# Altium PCB PCB.PcbDoc
Units mm, origin at the board's own origin, x right, y up, seen from the top; angles counter-clockwise.
Board outline 36.07 x 18.54 mm, 2 copper layers (Top Layer, Bottom Layer); 30 components, 21 nets, 74 pads, 11 vias.
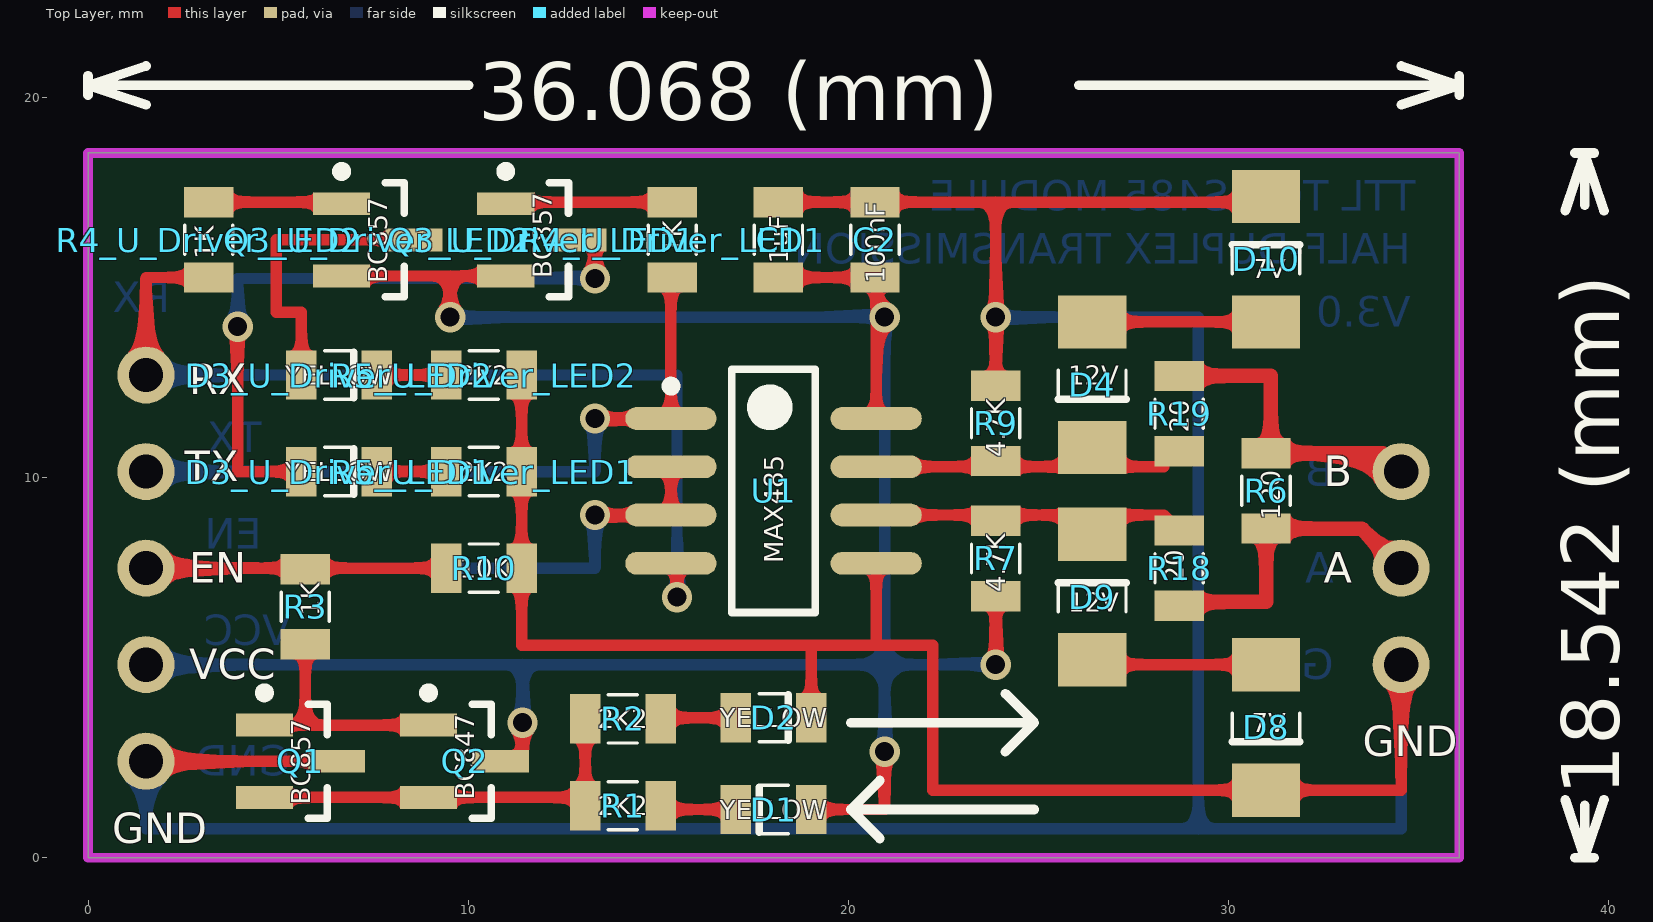
[diagram p0: Top Layer view]
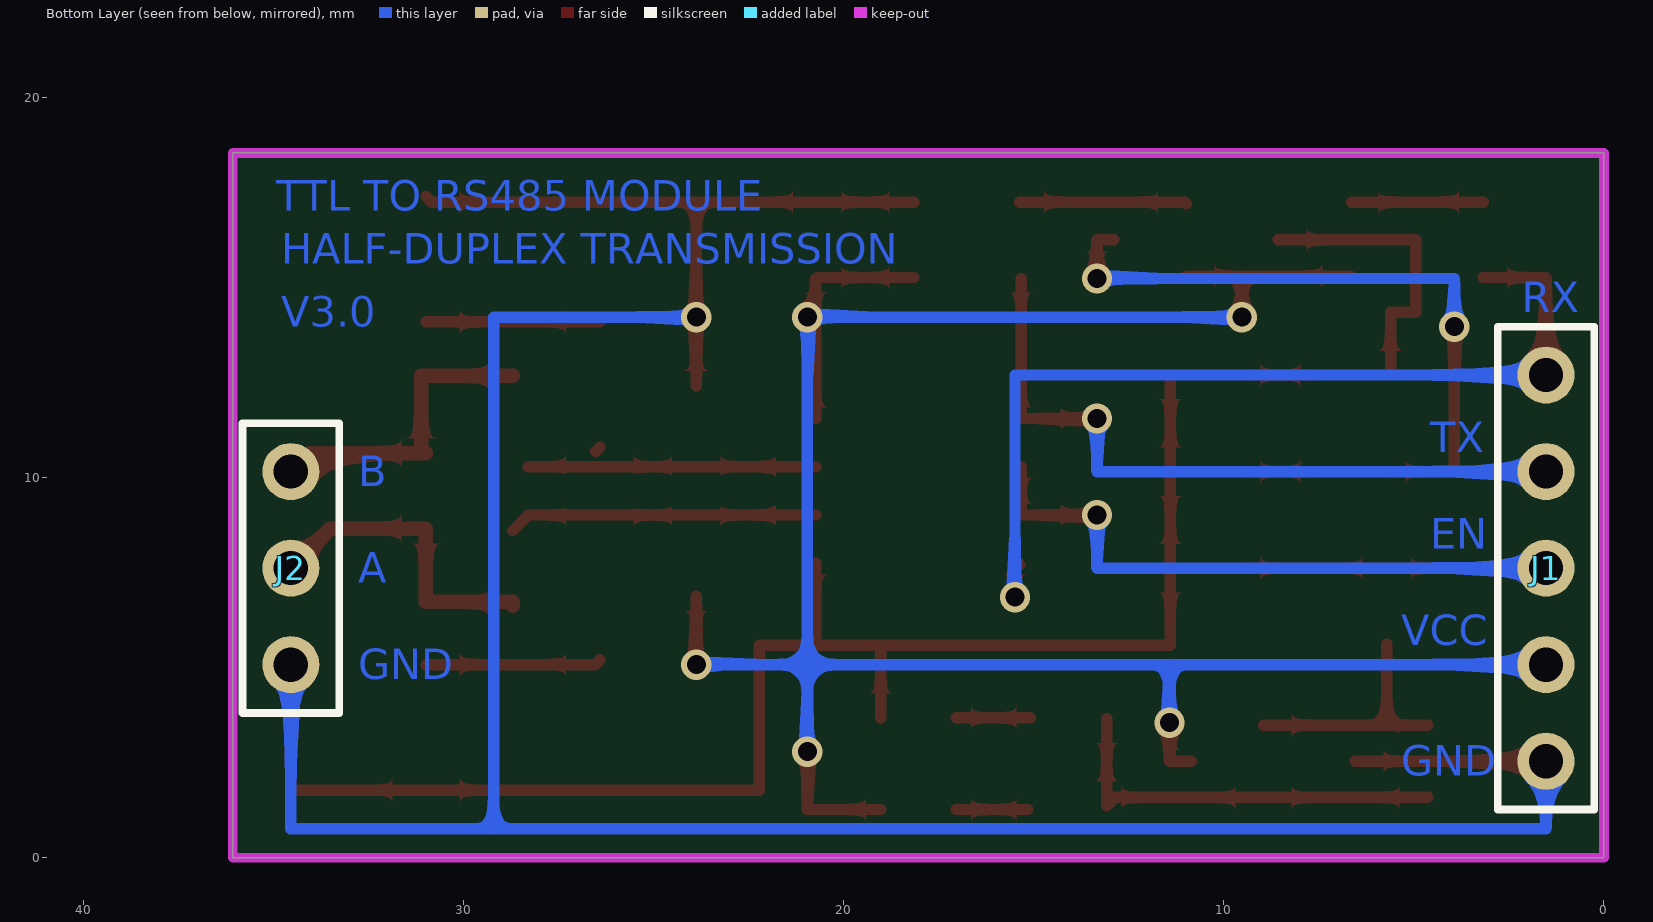
[diagram p1: Bottom Layer view, seen from below]

## Layer stack, top to bottom
Top Solder: solder mask 0.0102, Solder Resist, Dk 3.5
Top Layer: signal copper 0.0356
Dielectric 1: dielectric 0.32, FR-4, Dk 4.8
Bottom Layer: signal copper 0.0356
Bottom Solder: solder mask 0.0102, Solder Resist, Dk 3.5

## Board outline
0,0 0,18.542 36.068,18.542 36.068,0

## Design rules (kind name [scope] priority, off if disabled: settings)
Clearance [All] p1: gap=0.3
PolygonConnect [All] p1: connectstyle=Relief reliefconductorwidth=0.254 reliefentries=4 polygonreliefangle="90 Angle" airgapwidth=0.254
RoomDefinition "U_Driver_Push Pull" [InComponentClass('U_Driver_Push Pull')] p1: confinementstyle=ConfineIn formatcopy=TRUE lockcomponents=FALSE outline -24.638,-34.544 26.162,-34.544 26.162,-9.144 -24.638,-9.144
RoomDefinition U_Driver_LED2 [InComponentClass('U_Driver_LED2')] p2: confinementstyle=ConfineIn formatcopy=TRUE lockcomponents=FALSE outline -24.638,-34.544 26.162,-34.544 26.162,-9.144 -24.638,-9.144
RoomDefinition U_Driver_LED1 [InComponentClass('U_Driver_LED1')] p3: confinementstyle=ConfineIn formatcopy=TRUE lockcomponents=FALSE outline -24.638,-34.544 26.162,-34.544 26.162,-9.144 -24.638,-9.144
RoomDefinition U_Display_LED [InComponentClass('U_Display_LED')] p4: confinementstyle=ConfineIn formatcopy=TRUE lockcomponents=FALSE outline -24.638,-34.544 26.162,-34.544 26.162,-9.144 -24.638,-9.144
RoomDefinition Main [InComponentClass('Main')] p5: confinementstyle=ConfineIn formatcopy=TRUE lockcomponents=FALSE outline -24.638,-34.544 26.162,-34.544 26.162,-9.144 -24.638,-9.144
RoutingVias [All] p1: holewidth=0.8 width=1.27 viastyle="Through Hole" minholewidth=0.5 minwidth=0.8 maxholewidth=0.8 maxwidth=1.27
SolderMaskExpansion [All] p1: expansion=0.102
Width [All] p1: maxlimit=0.3 minlimit=0.3 preferedwidth=0.3
30 further rules are at their usual default settings.

## Classes and differential pairs
channel class Driver_LED: U_Driver_LED1 U_Driver_LED2
component class U_Driver_LED2: D3_U_Driver_LED2 Q3_U_Driver_LED2 R4_U_Driver_LED2 R5_U_Driver_LED2
component class U_Driver_LED1: D3_U_Driver_LED1 Q3_U_Driver_LED1 R4_U_Driver_LED1 R5_U_Driver_LED1
component class "U_Driver_Push Pull": Q1 Q2 R3
component class U_Display_LED: D1 D2 R1 R2
component class Main: C1 C2 D4 D8 D9 D10 J1 J2 R6 R7 R9 R10 R18 R19 U1

## Components (designator, comment, footprint, x,y, rotation, side; value= is the part's Value field where it differs from the comment)
C1 "1uF" 0805 18.161,16.256 r270 top
C2 "100nF" 0805 20.701,16.256 r270 top
D1 "YELLOW" 0805_Diode 18.034,1.27 r180 top
D2 "YELLOW" 0805_Diode 18.034,3.683 r0 top
D3_U_Driver_LED1 "YELLOW" 0805_Diode 6.604,10.16 r0 top (schematic designator D3)
D3_U_Driver_LED2 "YELLOW" 0805_Diode 6.604,12.7 r0 top (schematic designator D3)
D4 "12V" ZENER_DIODE 26.416,12.446 r270 top
D8 "7V" ZENER_DIODE 30.988,3.429 r270 top
D9 "12V" ZENER_DIODE 26.416,6.858 r90 top
D10 "7V" ZENER_DIODE 30.988,15.748 r90 top
J1 "Header 5" HDR1X5 1.524,12.7 r270 bottom
J2 "Header 3" HDR1X3 34.544,5.08 r90 bottom
Q1 "BC857" SOT23-3N 5.588,2.54 r0 top
Q2 "BC847" SOT23-3N 9.906,2.54 r0 top
Q3_U_Driver_LED1 "BC857" SOT23-3N 11.938,16.256 r0 top (schematic designator Q3)
Q3_U_Driver_LED2 "BC857" SOT23-3N 7.62,16.256 r0 top (schematic designator Q3)
R1 "2K2" 0805 14.07,1.37 r0 top
R2 "2K2" 0805 14.07,3.656 r180 top
R3 "1K" 0805 5.715,6.604 r90 top
R4_U_Driver_LED1 "1K" 0805 15.367,16.256 r270 top (schematic designator R4)
R4_U_Driver_LED2 "1K" 0805 3.175,16.256 r270 top (schematic designator R4)
R5_U_Driver_LED1 "2K2" 0805 10.414,10.16 r180 top (schematic designator R5)
R5_U_Driver_LED2 "2K2" 0805 10.414,12.7 r180 top (schematic designator R5)
R6 "120" 0805 30.988,9.652 r90 top
R7 "4.7K" 0805 23.876,7.874 r90 top
R9 "4.7K" 0805 23.876,11.43 r90 top
R10 "10K" 0805 10.414,7.62 r180 top
R18 "20" 0805 28.702,7.62 r90 top
R19 "20" 0805 28.702,11.684 r270 top
U1 "MAX485" SOP127P636-8N 18.034,9.652 r0 top

## Footprints (in the part's own frame and the unit in brackets; to place one, negate y for a bottom-side part, rotate by r counter-clockwise, add the part's x,y. Pads: shape width x height; smd on the part's side, far side on the other; paste and mask are expansions set on the pad)
0805 [mm] "Chip Resistor, Body 2.0x1.3mm, IPC Medium Density"
  rect 0.8x1.3 smd: 1(-0.991,0) 2(0.991,0)
  silkscreen extent -0.38,-0.64 0.38,0.64, body extent -1.07,-0.7 1.07,0.7, height 0.65
0805_Diode [mm] "Chip Resistor, Body 2.0x1.3mm, IPC Medium Density"
  rect 0.8x1.3 smd: 1(-0.991,0) 2(0.991,0)
  silkscreen extent -0.38,-0.64 0.38,0.64, body extent -1.07,-0.7 1.07,0.7, height 0.65
HDR1X3 [mm]
  round 1.5 hole 0.9: 1(0,0) 2(2.54,0) 3(5.08,0)
  silkscreen extent -1.27,-1.27 6.35,1.27
HDR1X5 [mm]
  round 1.5 hole 0.9: 1(0,0) 2(2.54,0) 3(5.08,0) 4(7.62,0) 5(10.16,0)
  silkscreen extent -1.27,-1.27 11.43,1.27
SOP127P636-8N [mm] "SOP, 8-Leads, Body 6x4.7mm, Pitch 1.27mm, IPC Medium Density"
  oval 2.4x0.6 smd: 1(-2.7,1.905) 2(-2.7,0.635) 3(-2.7,-0.635) 4(-2.7,-1.905) 5(2.7,-1.905) 6(2.7,-0.635) 7(2.7,0.635) 8(2.7,1.905)
  silkscreen extent -2.82,-3.2 1.1,3.2, body extent -2.36,-3.17 2.36,3.17, height 1.5
SOT23-3N [mm] "SOT23, 3-Leads, Body 2.9x1.3mm, Pitch 0.95mm, Lead Span 2.5mm, IPC Medium Density"
  rect 1.5x0.6 smd: 1(-0.95,0.95) 2(-0.95,-0.95) 3(0.95,0)
  silkscreen extent -1.07,-1.5 0.7,1.92, body extent -0.7,-1.5 0.7,1.5, height 1.1
ZENER_DIODE [mm] "Chip Resistor, Body 2.0x1.3mm, IPC Medium Density"
  rect 1.4x1.8 smd: 1(-1.651,0) 2(1.651,0)
  silkscreen extent -0.38,-0.89 0.38,0.89

## Part data
C1 C2: library part Cap, "Capacitor"
D1 D2 D3_U_Driver_LED1 D3_U_Driver_LED2: library part "Optical Transmitter", "Typical INFRARED GaAs LED"
D4 D8 D9 D10: library part "D Zener", "Zener Diode"
J1: "Header, 5-Pin"
J2: "Header, 3-Pin"
Q1 Q2 Q3_U_Driver_LED1 Q3_U_Driver_LED2: "Silicon Bipolar Transistor"
R1 R2 R3 R4_U_Driver_LED1 R4_U_Driver_LED2 R5_U_Driver_LED1 R5_U_Driver_LED2 R6 R7 R9 R10 R18 R19: library part Res1, "Resistor"
U1: library part MAX485CPA, "Low-Power, Slew-Rate-Limited RS-485/RS-422 Transceiver"

## Via types
v1: diameter 0.8, hole 0.5, Top Layer to Bottom Layer, 11 vias

## Nets (pads, with @x,y where several pads share a name; then routed paths per layer and width w, separated by ;. In a path a pad name is that pad's centre, name@x,y a point inside that pad or via, vN(x,y) a via of type N, cw(c..) or ccw(c..) an arc to the next point about the centre after c; other vN are vias at no path point)
+5V: C1.2 C2.2 D1.1 J1.4 Q2.3 Q3_U_Driver_LED1.2 Q3_U_Driver_LED2.2 R7.1 U1.8 | length 65.2
  Top Layer w0.3: Q3_U_Driver_LED2.2 9.525,15.306 ; v1(9.525,14.224) 9.525,15.306 ; Q2.3 11.43,2.54 v1(11.43,3.556) ; Q3_U_Driver_LED1.2 9.525,15.306 ; C1.2 C2.2 20.734,15.232 U1.8 ; D1.1 20.955,1.27 v1(20.955,2.794) ; v1(23.876,5.08) R7.1
  Bottom Layer w0.3: J1.4 11.43,5.08 ; v1(9.525,14.224) v1(20.955,14.224) 20.955,5.08 ; v1(11.43,3.556) 11.43,5.08 ; v1(20.955,2.794) 20.955,5.08 ; v1(23.876,5.08) 20.955,5.08 ; 11.43,5.08 20.955,5.08
EN: J1.3 R3.2 R10.2 U1.2 U1.3 | length 24.4
  Top Layer w0.3: J1.3 R10.2 ; v1(13.335,9.017) U1.3 U1.2
  Bottom Layer w0.3: J1.3 13.335,7.62 v1(13.335,9.017)
GND: C1.1 C2.1 D2.2 D8.2 D10.2 J1.5 J2.1 Q1.3 R5_U_Driver_LED1.1 R5_U_Driver_LED2.1 R9.2 R10.1 U1.5 | length 122
  Top Layer w0.3: J1.5 Q1.3 ; R5_U_Driver_LED2.1 R5_U_Driver_LED1.1 R10.1 11.405,5.588 22.225,5.588 22.225,1.778 D8.2 34.544,1.778 J2.1 ; C1.1 C2.1 23.876,17.247 ; D2.2 19.025,5.563 ; 20.734,5.621 U1.5 ; R9.2 23.876,17.247 ; D10.2@30.836,17.247 23.876,17.247 ; D10.2@30.861,17.272 D10.2
  Bottom Layer w0.3: J1.5 1.524,0.762 34.544,0.762 J2.1 ; v1(23.876,14.224) 29.21,14.224 29.21,0.762
NetD1_2: D1.2 R1.2 | length 1.9
  Top Layer w0.3: R1.2@15.161,1.27 D1.2
NetD2_1: D2.1 R2.1 | length 2
  Top Layer w0.3: R2.1@15.088,3.683 D2.1
NetD3_U_Driver_LED1_1: D3_U_Driver_LED1.1 Q3_U_Driver_LED1.3 | length 17.6
  Top Layer w0.3: v1(3.937,13.97) 3.937,10.16 D3_U_Driver_LED1.1 ; Q3_U_Driver_LED1.3 13.335,16.256 v1(13.335,15.24)
  Bottom Layer w0.3: v1(3.937,13.97) 3.937,15.24 v1(13.335,15.24)
NetD3_U_Driver_LED1_2: D3_U_Driver_LED1.2 R5_U_Driver_LED1.2 | length 1.8
  Top Layer w0.3: D3_U_Driver_LED1.2 R5_U_Driver_LED1.2
NetD3_U_Driver_LED2_1: D3_U_Driver_LED2.1 Q3_U_Driver_LED2.3 | length 7.8
  Top Layer w0.3: D3_U_Driver_LED2.1 5.613,14.351 4.953,14.351 4.953,16.256 Q3_U_Driver_LED2.3
NetD3_U_Driver_LED2_2: D3_U_Driver_LED2.2 R5_U_Driver_LED2.2 | length 1.8
  Top Layer w0.3: D3_U_Driver_LED2.2 R5_U_Driver_LED2.2
NetD4_1: D4.1 D10.1 | length 4.6
  Top Layer w0.3: D4.1 D10.1
NetD4_2: D4.2 R9.1 R19.2 U1.7 | length 15.3
  Top Layer w0.3: D4.2 D4.2@26.518,10.693 ; U1.7 28.296,10.287 U1.7
NetD8_1: D8.1 D9.1 | length 4.6
  Top Layer w0.3: D9.1 26.543,5.08 D8.1
NetD9_2: D9.2 R7.2 R18.2 U1.6 | length 15.7
  Top Layer w0.3: R18.2 28.296,9.017 ; 28.296,9.017 U1.6 28.296,9.017
NetQ1_1: Q1.1 Q2.1 R3.1 | length 6.4
  Top Layer w0.3: Q1.1 5.715,3.49 ; R3.1 5.715,3.49 ; Q2.1 5.715,3.49
NetQ1_2: Q1.2 Q2.2 R1.1 R2.2 | length 10.8
  Top Layer w0.3: Q1.2 Q2.2 12.859,1.59 R1.1 R2.2
NetQ3_U_Driver_LED1_1: Q3_U_Driver_LED1.1 R4_U_Driver_LED1.1 | length 4.4
  Top Layer w0.3: Q3_U_Driver_LED1.1 11.029,17.247 R4_U_Driver_LED1.1
NetQ3_U_Driver_LED2_1: Q3_U_Driver_LED2.1 R4_U_Driver_LED2.1 | length 3.5
  Top Layer w0.3: R4_U_Driver_LED2.1 Q3_U_Driver_LED2.1@6.629,17.247
RS485_A: J2.2 R6.1 R18.1 | length 8.3
  Top Layer w0.381: R18.1 28.702,6.731 30.988,6.731 R6.1 33.503,8.661 J2.2
RS485_B: J2.3 R6.2 R19.1 | length 8.3
  Top Layer w0.381: R19.1 31.115,12.675 31.115,10.77 R6.2 34.061,10.643 J2.3
RX: J1.1 R4_U_Driver_LED2.2 U1.4 | length 25
  Top Layer w0.3: J1.1 1.524,15.265 R4_U_Driver_LED2.2 ; U1.4@15.367,7.714 15.4,7.747 15.494,7.653 v1(15.494,6.858)
  Bottom Layer w0.3: J1.1 15.494,12.7 v1(15.494,6.858)
TX: J1.2 R4_U_Driver_LED1.2 U1.1 | length 18.9
  Top Layer w0.3: v1(13.335,11.557) U1.1 R4_U_Driver_LED1.2@15.334,15.232
  Bottom Layer w0.3: J1.2 13.335,10.16 v1(13.335,11.557)

## Keep-outs
Keep-Out Layer:
  the board outline again, w0.254

## Other copper
Bottom Layer:
  text "TTL TO RS485 MODULE" at 34.925,17.018 h0.8
  text "HALF-DUPLEX TRANSMISSION" at 34.798,15.621 h0.8
  text "RX" at 2.159,14.351 h0.8
  text "V3.0" at 34.798,13.97 h0.8
  text "TX" at 4.572,10.668 h0.8
  text "B" at 32.766,9.779 h0.8
  text "EN" at 4.572,8.128 h0.8
  text "A" at 32.766,7.239 h0.8
  text "VCC" at 5.334,5.588 h0.8
  text "GND" at 32.766,4.699 h0.8
  text "GND" at 5.334,2.159 h0.8

## Silkscreen, mask and mechanical layers (free items; w line width, h text height)
Top Overlay:
  lines w0.254: 0,20.066 0,20.574 ; 1.524,19.812 0,20.32 ; 1.524,20.828 0,20.32 ; 10.01,20.32 0,20.32 ; 20.066,3.556 24.892,3.556 ; 20.828,0.508 20.066,1.27 ; 20.828,2.032 20.066,1.27 ; 24.13,2.794 24.892,3.556 ; 24.13,4.318 24.892,3.556 ; 24.892,1.27 20.066,1.27 ; 26.058,20.32 36.068,20.32 ; 34.544,19.812 36.068,20.32 ; 34.544,20.828 36.068,20.32 ; 36.068,20.066 36.068,20.574 ; 38.862,1.524 39.37,0 ; 38.862,17.018 39.37,18.542 ; 39.116,0 39.624,0 ; 39.116,18.542 39.624,18.542 ; 39.37,1.374 39.37,0 ; 39.37,17.168 39.37,18.542 ; 39.878,1.524 39.37,0 ; 39.878,17.018 39.37,18.542
  text "36.068 (mm)" at 10.264,19.406 h1.52
  text "RX" at 2.667,12.192 h0.8
  text "TX" at 2.54,9.906 h0.8
  text "B" at 32.512,9.779 h0.8
  text "EN" at 2.667,7.239 h0.8
  text "A" at 32.512,7.239 h0.8
  text "VCC" at 2.667,4.699 h0.8
  text "GND" at 33.528,2.667 h0.8
  text "18.542 (mm)" at 40.284,1.628 h1.52 r90
  text "GND" at 0.635,0.381 h0.8
Mechanical 15:
  rectangle: 17.272,2.794 18.796,4.318
  rectangle: 17.272,0.508 18.796,2.032
  rectangle: 13.462,0.508 14.986,2.032
  rectangle: 13.208,3.048 14.732,4.572
  rectangle: 25.654,6.096 27.178,7.62
  rectangle: 30.226,3.556 31.75,5.08
  rectangle: 23.114,7.112 24.638,8.636
  rectangle: 28.194,6.858 29.718,8.382
  rectangle: 20.066,13.462 21.59,14.986
  rectangle: 23.114,10.668 24.638,12.192
  rectangle: 30.226,8.89 31.75,10.414
  rectangle: 27.94,10.922 29.464,12.446
  rectangle: 25.654,11.684 27.178,13.208
  rectangle: 30.226,14.224 31.75,15.748
  rectangle: 9.652,6.858 11.176,8.382
  rectangle: 5.842,6.858 7.366,8.382
  rectangle: 5.842,9.398 7.366,10.922
  rectangle: 9.652,9.398 11.176,10.922
  rectangle: 9.652,11.938 11.176,13.462
  rectangle: 5.842,11.938 7.366,13.462
  rectangle: 14.478,15.494 16.002,17.018
  rectangle: 3.556,15.494 5.08,17.018